# Altium PCB 4layer_main_board.PcbDoc
Units mm, origin at the board's own origin, x right, y up, seen from the top; angles counter-clockwise.
Board outline 50 x 100 mm, 4 copper layers (Top Layer, Int1 (GND), Int2 (PWR), Bottom Layer), stack 1.369 mm thick; 65 components, 49 nets, 289 pads, 72 vias.
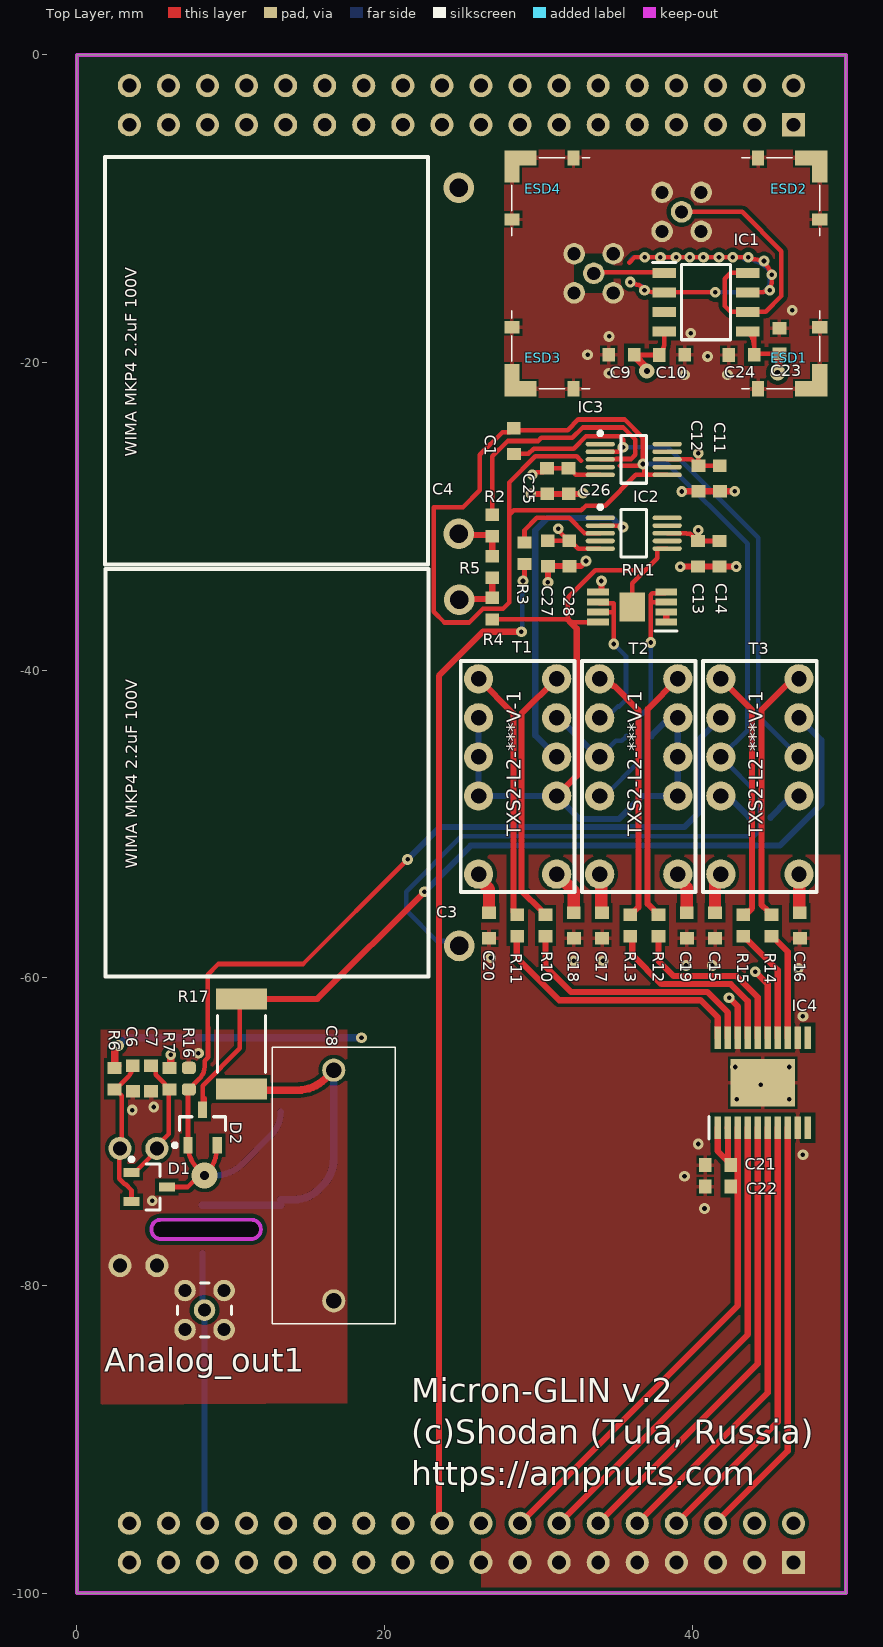
[diagram p0: Top Layer view]
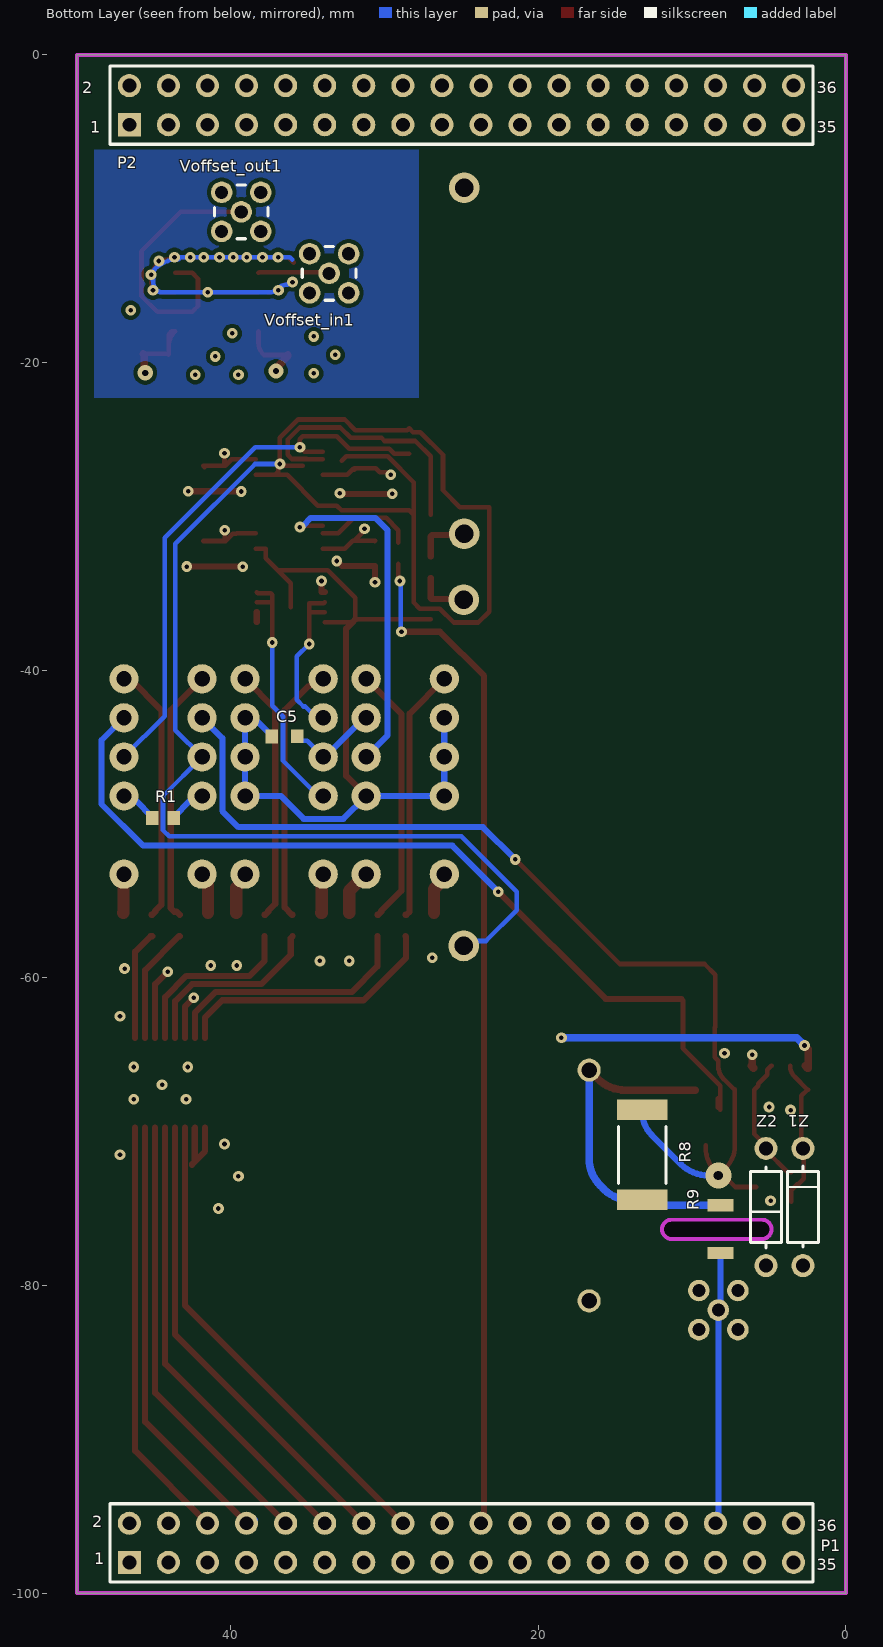
[diagram p1: Bottom Layer view, seen from below]
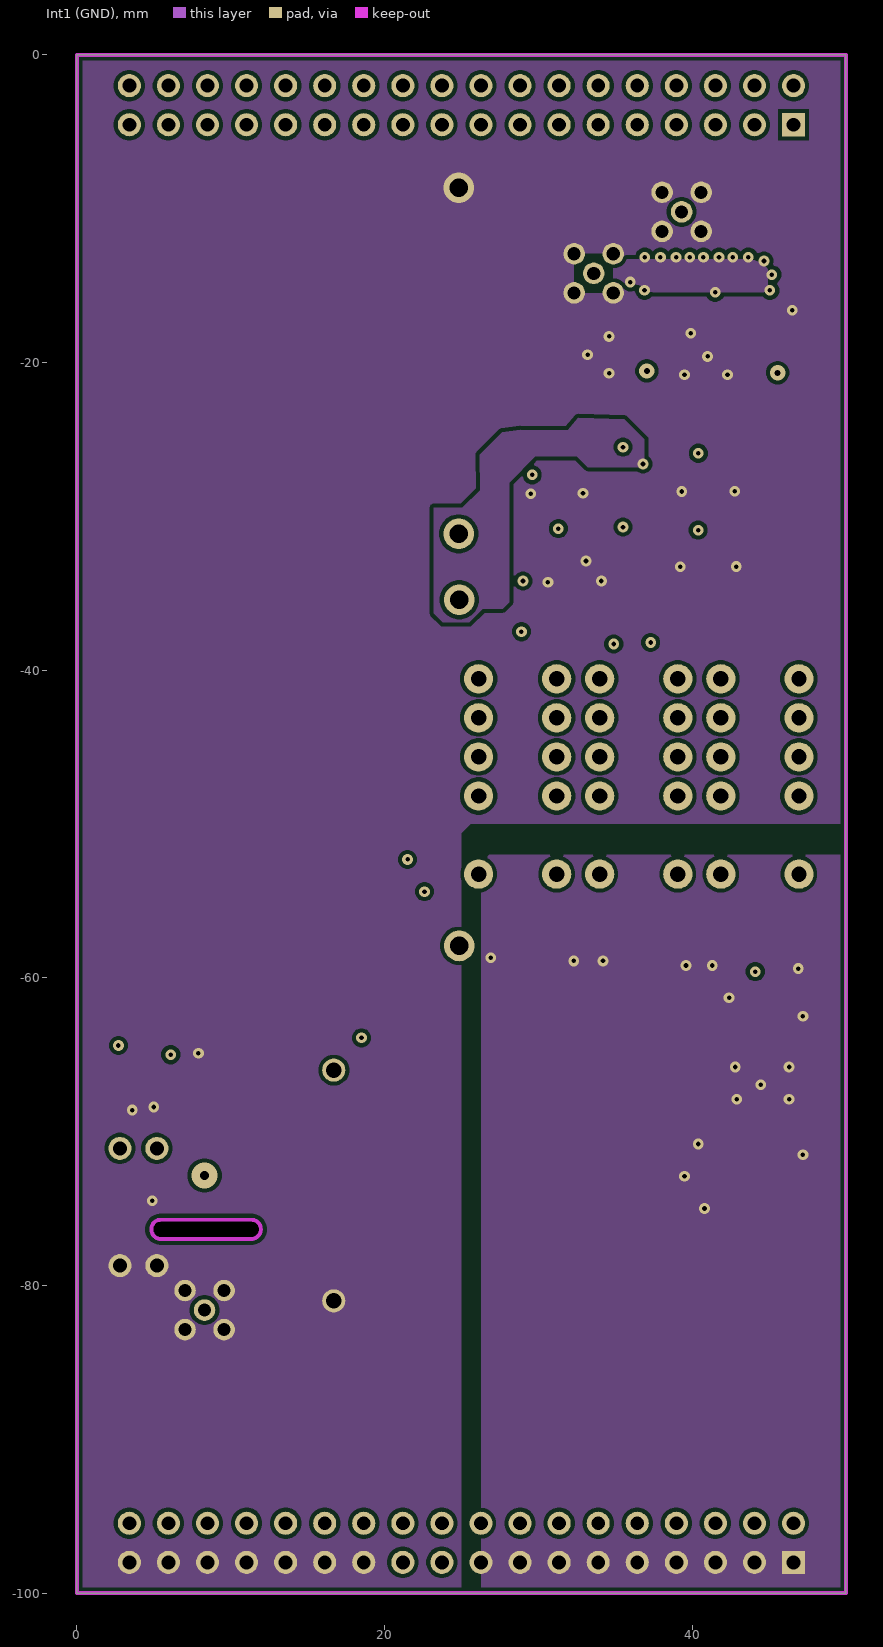
[diagram p2: Int1 (GND)]
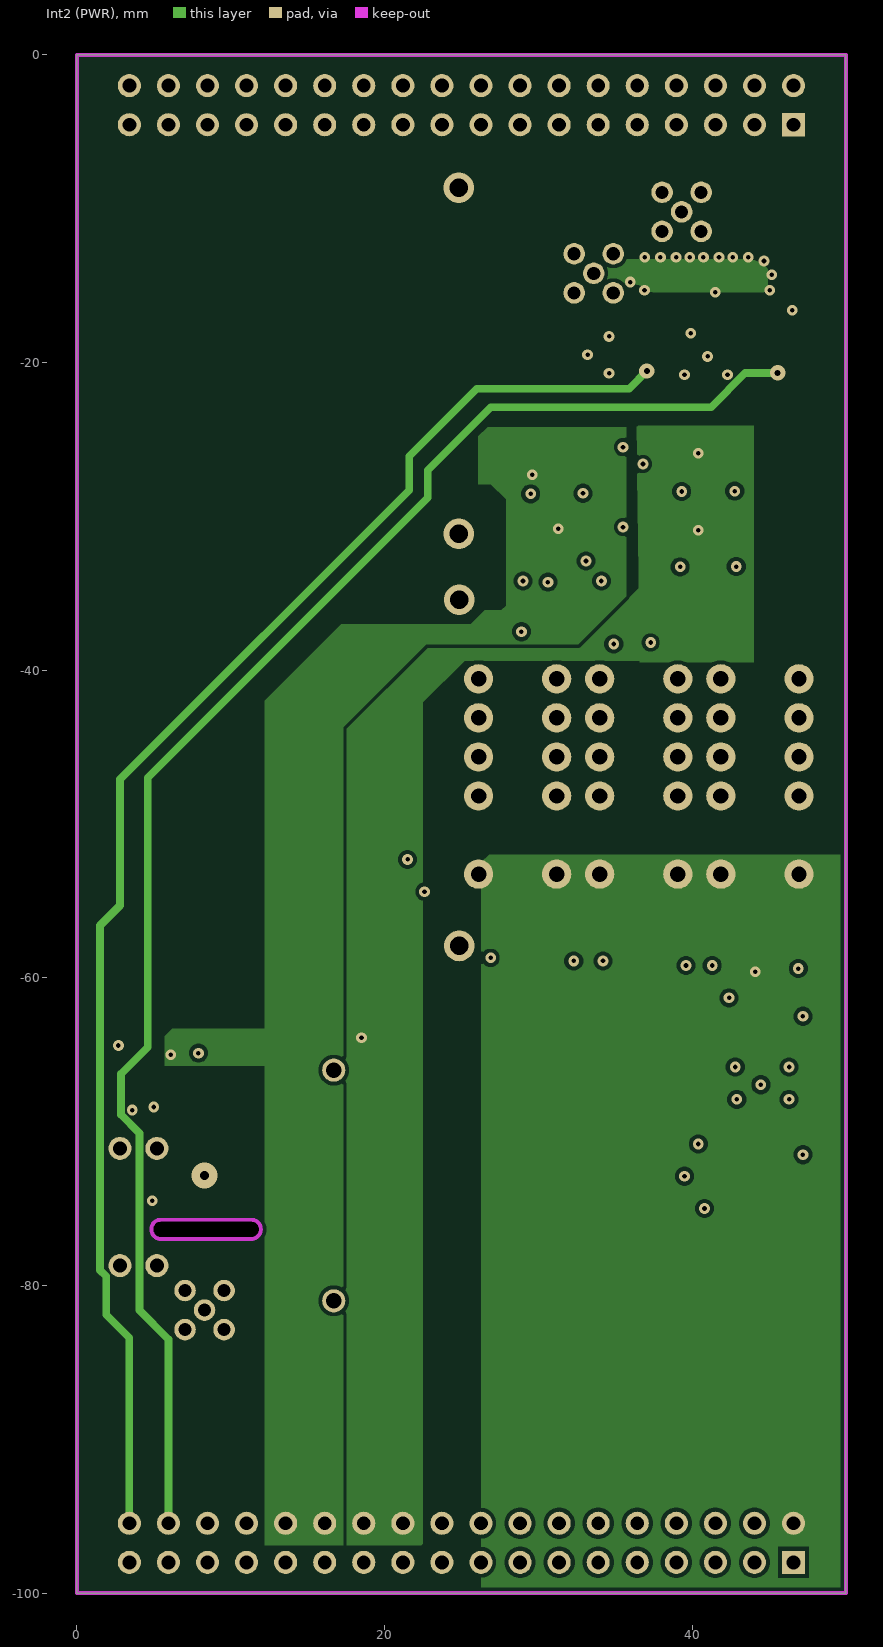
[diagram p3: Int2 (PWR)]

## Layer stack, top to bottom
Top Solder: solder mask 0.0254, SM-001, Dk 4
Top Layer: signal copper 0.035
Dielectric 1: prepreg 0.1295, PP-017, Dk 4.3
Dielectric 2: prepreg 0.1295, PP-017, Dk 4.3
Int1 (GND): signal copper 0.035
Dielectric 3: core 0.7112, Core-039, Dk 4.8
Int2 (PWR): signal copper 0.035
Dielectric 4: prepreg 0.1295, PP-017, Dk 4.3
Dielectric 5: prepreg 0.1295, PP-017, Dk 4.3
Bottom Layer: signal copper 0.035
Bottom Solder: solder mask 0.0254, SM-001, Dk 4

## Board outline
0,-100 50,-100 50,0 0,0
cut-out: 5.588,-75.725 11.338,-75.725 cw(c11.338,-76.35) 11.963,-76.35 cw(c11.338,-76.35) 11.338,-76.975 5.463,-76.975 cw(c5.463,-76.35) 4.838,-76.35 cw(c5.463,-76.35) 5.463,-75.725

## Design rules (kind name [scope] priority, off if disabled: settings)
BoardOutlineClearance [All] p1: gap=0.381 ignorepadtopadclearanceinfootprint=FALSE
Clearance "Clearance Polygons" [InPolygon] p1: gap=0.254 ignorepadtopadclearanceinfootprint=FALSE except(0: Arc-Hole Track-Hole SMDPad-Hole THPad-Hole Via-Hole Fill-Hole Poly-Hole Region-Hole Text-Hole)
Clearance [All] p2: gap=0.127 ignorepadtopadclearanceinfootprint=FALSE except(0: Arc-Hole Track-Hole SMDPad-Hole THPad-Hole Via-Hole Fill-Hole Poly-Hole Region-Hole Text-Hole)
ComponentClearance "HM-TRP & UFL" [InComponent('X1') vs InComponent('U1')] p1: gap=0 collisioncheckmode=3 verticalgap=0 showdistances=FALSE
ComponentClearance [All] p2: gap=0.025 collisioncheckmode=3 verticalgap=0.025 showdistances=FALSE
DiffPairsRouting [All] p1: maxlimit=10 minlimit=0.127 mostfreqgap=0.203 toplayer_minwidth=0.127 toplayer_maxwidth=0.381 toplayer_prefwidth=0.203 midlayer1_minwidth=0.127 midlayer1_maxwidth=0.381 midlayer1_prefwidth=0.203 midlayer2_minwidth=0.127 midlayer2_maxwidth=0.381 midlayer2_prefwidth=0.203 bottomlayer_minwidth=0.127 bottomlayer_maxwidth=0.381 bottomlayer_prefwidth=0.203 maxuncoupledlength=12.7
HoleSize [All] p1: absolutevalues=TRUE maxlimit=6.731 minlimit=0.254 maxpercent=80.000 minpercent=20.000
HoleToHoleClearance [All] p1: gap=0.254 allowstackedmicrovias=FALSE
MinimumAnnularRing [All] p1: minimumring=0.102
MinimumSolderMaskSliver [All] p1: minsoldermaskwidth=0
PlaneClearance [All] p1: clearance=0.254
PlaneConnect [All] p1: planeconnectstyle=Direct reliefexpansion=0.102 reliefentries=4 reliefconductorwidth=0.152 reliefairgap=0.152
PolygonConnect PolygonConnect_pwr_gnd [IsPoly] p1: thpad.connectstyle=Direct thpad.reliefconductorwidth=0.254 thpad.reliefentries=4 thpad.polygonreliefangle="90 Angle" thpad.airgapwidth=0.152 smdpad.connectstyle=Relief smdpad.reliefconductorwidth=0.254 smdpad.reliefentries=4 smdpad.polygonreliefangle="90 Angle" smdpad.airgapwidth=0.152 via.connectstyle=Direct via.reliefconductorwidth=0.254 via.reliefentries=4 via.polygonreliefangle="90 Angle" via.airgapwidth=0.152
PolygonConnect PolygonConnect_1 [All] p2: connectstyle=Relief reliefconductorwidth=0.254 reliefentries=4 polygonreliefangle="90 Angle" airgapwidth=0.254
PolygonConnect "Via connect style" [isVia] p3: connectstyle=Direct reliefconductorwidth=0.254 reliefentries=4 polygonreliefangle="90 Angle" airgapwidth=0.254
RoutingCorners [All] p1: cornerstyle=45-Degree minsetback=1.25 maxsetback=1.25
RoutingVias [All] p1: holewidth=0.305 width=0.559 viastyle="Through Hole" minholewidth=0.254 minwidth=0.457 maxholewidth=2.54 maxwidth=2.896
SilkToSilkClearance [All] p1: silktosilkclearance=0
SilkToSolderMaskClearance [IsPad] p1: minsilkscreentomaskgap=0.127 clearancetoexposedcopper=TRUE
SolderMaskExpansion Guard_1 [Grd] p1: expansion=0.05 istentingtop=FALSE
SolderMaskExpansion [All] p2: expansion=0.064 istentingtop=FALSE
Width GND [InNet('GND')] p1: maxlimit=0.762 minlimit=0.254 preferedwidth=0.508
Width Power [InNetClass('Power')] p2: maxlimit=1.016 minlimit=0.508 preferedwidth=0.762
Width 3V3 [InNetClass('3V3')] p3: maxlimit=0.762 minlimit=0.254 preferedwidth=0.508
Width [All] p4: maxlimit=10.16 minlimit=0.152 preferedwidth=0.203
20 further rules are at their usual default settings.

## Components (designator, comment, footprint, x,y, rotation, side; value= is the part's Value field where it differs from the comment)
Analog_out1 "MMCX" MMCX2.54-V5 8.3,-81.6 r0 top
C1 "1uF 50V 0603" "CAP 0603" 28.4,-25.1 r90 top
C3 "WIMA MKP4 2.2uF 100V" "90g WIMA MKP4 2.2uF 100V" 22.857,-59.924 r90 top locked
C4 "WIMA MKP4 2.2uF 100V" "90g WIMA MKP4 2.2uF 100V" 22.825,-33.138 r90 top locked
C5 "1nF 100V 0603" "CAP 0603" 36.5,-44.3 r180 bottom
C6 "1uF 50V 0603" "CAP 0603" 3.64,-66.556 r270 top
C7 "1uF 50V 0603" "CAP 0603" 4.826,-66.556 r270 top
C8 "WIMA MKP4 680nF 100V" MKP4F036804F00KSSD 16.7,-81 r90 top
C9 "100nF 100V 0603" "CAP 0603" 35.397,-19.499 r180 top
C10 "1uF 50V 0603" "CAP 0603" 38.699,-19.499 r0 top
C11 "100nF 100V 0603" "CAP 0603" 41.807,-27.545 r270 top
C12 "1uF 50V 0603" "CAP 0603" 40.41,-27.545 r270 top
C13 "100nF 100V 0603" "CAP 0603" 40.388,-32.445 r270 top
C14 "1uF 50V 0603" "CAP 0603" 41.785,-32.445 r270 top
C15 "1uF 0603" "CAP 0603" 41.491,-56.61 r270 top
C16 "1uF 0603" "CAP 0603" 47,-56.61 r270 top
C17 "1uF 0603" "CAP 0603" 34.145,-56.61 r270 top
C18 "1uF 0603" "CAP 0603" 32.309,-56.61 r270 top
C19 "1uF 0603" "CAP 0603" 39.655,-56.61 r270 top
C20 "1uF 0603" "CAP 0603" 26.8,-56.61 r270 top
C21 "1uF 0603" "CAP 0603" 41.668,-72.173 r180 top
C22 "100nF 0603" "CAP 0603" 41.668,-73.57 r180 top
C23 "100nF 100V 0603" "CAP 0603" 45.684,-18.61 r270 top
C24 "1uF 50V 0603" "CAP 0603" 43.213,-19.499 r0 top
C25 "100nF 100V 0603" "CAP 0603" 30.566,-27.696 r90 top
C26 "1uF 50V 0603" "CAP 0603" 31.963,-27.696 r90 top
C27 "100nF 100V 0603" "CAP 0603" 30.61,-32.396 r90 top
C28 "1uF 50V 0603" "CAP 0603" 32.012,-32.396 r90 top
D1 "BAV99" INF-SOT23_N 4.7,-73.6 r0 top
D2 "BAV99" INF-SOT23_N 8.17,-69.731 r90 top
ESD1 "Harwin Clips" "HARWIN - S0981-46R - CLIP" 48.785,-22.2 r90 top locked
ESD2 "Harwin Clips" "HARWIN - S0981-46R - CLIP" 48.785,-6.2 r180 top locked
ESD3 "Harwin Clips" "HARWIN - S0981-46R - CLIP" 27.785,-22.2 r0 top locked
ESD4 "Harwin Clips" "HARWIN - S0981-46R - CLIP" 27.785,-6.2 r270 top locked
IC1 "ADA4530-1ARZ" SOIC127P600X175-8N 40.903,-16.07 r0 top
IC2 "LTC2057HVHMS" LT-MS-10_M 36.2,-31.1 r0 top
IC3 "LTC2057HVHMS" LT-MS-10_M 36.2,-26.3 r0 top
IC4 "MAX4821EUP+" SOP65P638X110-21N 44.588,-66.825 r90 top
P1 "Header 18X2" HDR2X18 46.59,-98 r180 bottom locked
P2 "Header 18X2" HDR2X18 46.59,-4.54 r180 bottom locked
R1 "10K 0603" 1608[0603] 44.4,-49.6 r0 bottom
R2 "1K 0603" 1608[0603] 27,-30.6 r90 top
R3 "4.53K 0603" 1608[0603] 29.1,-32.4 r270 top
R4 "12K 0603 1%" 1608[0603] 27,-36 r270 top
R5 "11K 0603 1%" 1608[0603] 27,-33.3 r270 top
R6 "10k 0603" 1608[0603] 2.455,-66.566 r270 top
R7 "10k 0603" 1608[0603] 6.011,-66.566 r90 top
R8 "200R 2512" CRCW2512 13.25,-71.505 r90 bottom
R9 "1k 1206 ferrite beard" "Yageo HV 1206" 8.17,-76.335 r270 bottom
R10 "30R 0603" 1608[0603] 30.463,-56.6 r270 top
R11 "30R 0603" 1608[0603] 28.626,-56.6 r270 top
R12 "30R 0603" 1608[0603] 37.808,-56.6 r270 top
R13 "30R 0603" 1608[0603] 35.972,-56.6 r270 top
R14 "30R 0603" 1608[0603] 45.154,-56.6 r270 top
R15 "30R 0603" 1608[0603] 43.317,-56.6 r270 top
R16 "100K 0603" 1608[0603]_RES 7.281,-66.556 r90 top
R17 "1K 2512" CRCW2512 10.7,-64.3 r90 top
RN1 "LT5400ACMS8E-1#PBF" SOP65P490X110-9N 36.1,-35.9 r180 top
T1 "TXS2-L2-4.5V-1" TXS2-L2-4.5V-1 28.653,-46.909 r90 top locked
T2 "TXS2-L2-4.5V-1" TXS2-L2-4.5V-1 36.527,-46.909 r90 top locked
T3 "TXS2-L2-4.5V-1" TXS2-L2-4.5V-1 44.401,-46.909 r90 top locked
Voffset_in1 "MMCX" MMCX2.54-V5 33.6,-14.2 r90 bottom
Voffset_out1 "MMCX" MMCX2.54-V5 39.316,-10.204 r180 bottom
Z1 "BZX55C27" DO-35 2.8,-74.9 r90 bottom
Z2 "BZX55C27" DO-35 5.2,-74.9 r270 bottom

## Footprints (in the part's own frame and the unit in brackets; to place one, negate y for a bottom-side part, rotate by r counter-clockwise, add the part's x,y. Pads: shape width x height; smd on the part's side, far side on the other; paste and mask are expansions set on the pad)
"90g WIMA MKP4 2.2uF 100V" [mm]
  round 2 hole 1.2: 1(2,-2) 2(24.5,-2)
  silkscreen extent 0,0 26.5,21, body extent 0,0 26.5,21, height 11
1608[0603] [mm]
  rect 0.8x0.9 smd: 1(-0.7,0) 2(0.7,0)
  body extent -0.87,-0.48 0.87,0.48, height 1.3
1608[0603]_RES [mm] "Chip Capacitor, Body 1.6x0.8mm, IPC High Density"
  rrect50% 0.8x0.9 smd: 1(-0.7,0) 2(0.7,0)
  body extent -0.85,-0.45 0.85,0.45, height 0.45
"CAP 0603" [mm]
  rect 0.8x0.9 smd: 1(-0.84,-0.01) 2(0.82,0)
  body extent -0.85,-0.45 0.85,0.45, height 0.8
CRCW2512 [mm] "Chip Resistor, 2-Leads, Body 6,30x3,15mm, IPC Medium Density"
  rect 1.35x3.3 smd: 1(-2.925,0) 2(2.925,0)
  silkscreen extent -1.85,-1.55 1.85,1.55, body extent -3.25,-1.65 3.25,1.65, height 0.7
DO-35 [mm] "Diode, Axial, Body 4.6 x 2 mm (LxDia. max), Pin spacing 7.62mm"
  round 1.5 hole 0.9: 1(-3.81,0) 2(3.81,0)
  silkscreen extent -2.6,-1 2.65,1, body extent -4.08,-0.95 4.08,0.96, height 1.91
"HARWIN - S0981-46R - CLIP" [mm]
  rect 1x0.8 smd: 1(0.5,4.5)
  rect 1x2.1 smd: 1(0.5,1.05)
  rect 2.1x1 smd: 1(1.05,0.5)
  rect 0.8x1 smd: 1(4.5,0.5)
  silkscreen extent 0.5,0.5 5.56,5.56, body extent 0.05,0.07 4.81,4.83, height 1.35
HDR2X18 [mm] "Connector; Header; 18x2 Position"
  rect 1.5x1.5 hole 0.9: 1(0,0)
  round 1.5 hole 0.9: 2(0,2.54) 3(2.54,0) 4(2.54,2.54) 5(5.08,0) 6(5.08,2.54) 7(7.62,0) 8(7.62,2.54) 9(10.16,0) 10(10.16,2.54) 11(12.7,0) 12(12.7,2.54) 13(15.24,0) 14(15.24,2.54) 15(17.78,0) 16(17.78,2.54) 17(20.32,0) 18(20.32,2.54) 19(22.86,0) 20(22.86,2.54) 21(25.4,0) 22(25.4,2.54) 23(27.94,0) 24(27.94,2.54) 25(30.48,0) 26(30.48,2.54) 27(33.02,0) 28(33.02,2.54) 29(35.56,0) 30(35.56,2.54) 31(38.1,0) 32(38.1,2.54) 33(40.64,0) 34(40.64,2.54) 35(43.18,0) 36(43.18,2.54)
  silkscreen extent -1.27,-1.27 44.45,3.81
INF-SOT23_N [mm] "SOT23, 3-Leads, Body 2.9x1.3 mm, Pitch 0.95 mm, IPC Medium Density"
  rect 1.05x0.6 smd: 1(-1.15,0.95) 2(-1.15,-0.95) 3(1.15,0)
  silkscreen extent -1.27,-1.5 0.7,1.92, body extent -0.7,-1.5 0.7,1.5, height 1.1
LT-MS-10_M [mm] "SOP, 10-Leads, Body 3x3mm, Pitch 0.50mm, IPC Low Density"
  oval 1.9x0.3 smd: 1(-2.175,1) 2(-2.175,0.5) 3(-2.175,0) 4(-2.175,-0.5) 5(-2.175,-1) 6(2.175,-1) 7(2.175,-0.5) 8(2.175,0) 9(2.175,0.5) 10(2.175,1)
  silkscreen extent -2.3,-1.55 0.82,1.82, body extent -1.55,-1.55 1.55,1.55, height 1.1
MKP4F036804F00KSSD [mm]
  round 1.5 hole 1: 1(0,0) 2(15,0)
  silkscreen extent -1.5,-4 16.5,4, body extent -1.5,-4 16.5,4, height 15.1
MMCX2.54-V5 [mm]
  round 1.4 hole 0.85: 1(0,0) 2(-1.27,-1.27) 3(1.27,-1.27) 4(1.27,1.27) 5(-1.27,1.27)
  silkscreen extent -1.75,-1.75 1.75,1.75, body extent -1.78,-1.75 1.73,1.75, height 4.42
SOIC127P600X175-8N [mm]
  rect 1.525x0.65 smd: 1(-2.712,1.905) 2(-2.712,0.635) 3(-2.712,-0.635) 4(-2.712,-1.905) 5(2.712,-1.905) 6(2.712,-0.635) 7(2.712,0.635) 8(2.712,1.905)
  silkscreen extent -3.47,-2.45 1.6,2.58, body extent -3,-2.45 3,2.45, height 1.75
SOP65P490X110-9N [mm]
  rect 1.425x0.45 smd: 1(-2.212,0.975) 2(-2.212,0.325) 3(-2.212,-0.325) 4(-2.212,-0.975) 5(2.212,-0.975) 6(2.212,-0.325) 7(2.212,0.325) 8(2.212,0.975)
  rect 1.68x1.88 smd: 9(0,0)
  silkscreen extent -2.93,1.55 -1.5,1.55, body extent -2.45,-1.5 2.45,1.5, height 1.1
SOP65P638X110-21N [mm]
  rect 1.45x0.45 smd: 1(-2.925,2.925) 2(-2.925,2.275) 3(-2.925,1.625) 4(-2.925,0.975) 5(-2.925,0.325) 6(-2.925,-0.325) 7(-2.925,-0.975) 8(-2.925,-1.625) 9(-2.925,-2.275) 10(-2.925,-2.925) 11(2.925,-2.925) 12(2.925,-2.275) 13(2.925,-1.625) 14(2.925,-0.975) 15(2.925,-0.325) 16(2.925,0.325) 17(2.925,0.975) 18(2.925,1.625) 19(2.925,2.275) 20(2.925,2.925)
  rect 3.1x4.2 smd: 21(0,0)
  silkscreen extent -3.65,3.5 -2.2,3.5, body extent -3.19,-3.25 3.19,3.25, height 1.1
TXS2-L2-4.5V-1 [mm]
  round 1.9 hole 1: 1(-6.35,2.54) 3(-1.27,2.54) 4(1.27,2.54) 5(3.81,2.54) 6(6.35,2.54) 7(6.35,-2.54) 8(3.81,-2.54) 9(1.27,-2.54) 10(-1.27,-2.54) 12(-6.35,-2.54)
  silkscreen extent -7.5,-3.7 7.5,3.7, body extent -7.5,-3.7 7.6,3.7, height 8.2
"Yageo HV 1206" [mm]
  rect 0.8x1.7 smd: 1(-1.55,0) 2(1.55,0)
  body extent -1.6,-0.8 1.5,0.8, height 0.6

## Part data
Analog_out1 Voffset_in1 Voffset_out1: library part COAX-M, "RF Coaxial PCB Connector, MMCX; Thru-Hole, Vertical Mount Plug,  50 Ohm Impedance", PackageDocument="Rev. A, 16-Jun-1997", ComponentLink1Description="Manufacturer Link", ComponentLink1URL=http://www.amphenolrf.com/, DatasheetDocument=30-May-2003, DrillSize="Corresponds to nominal value.", LatestRevisionDate=15-Jul-2004, LatestRevisionNote="Component Replaced.", PackageReference=908-21103, PCB_Layout="Complies with manufacturer's recommendation.", Published=15-Jul-2004, Publisher="Altium Limited"
C1 C3 C4 C5 C6 C7 C9 C10 C11 C12 C13 C14 C15 C16 C17 C18 C19 C20 C21 C22 C23 C24 C25 C26 C27 C28: library part CC1206_1UF_25V_10%_X7R, "Non-polarised capacitor", Case=1206, Manufacturer=GENERIC, Manufacturer1 ComponentHeight=1.75mm, Manufacturer1 Example=KEMET, Manufacturer1 Part Number=C1206C105K3RAC, Tolerance=±10%, Voltage=25V, Author="CERN DEM JLC", Component Type=Standard, CreateDate=03.12.2007, HelpURL=\\cern.ch\dfs\Applications\Altium\Datasheets\CC1206_X7R_KEMET.pdf, LatestRevisionDate=03.12.2007, Manufacturer Part Number=CC1206_1UF_25V_10%_X7R, Mounted=Yes, Part Description="SMD Multilayer Chip Ceramic Capacitor", Part Number=CC1206_1UF_25V_10%_X7R, Pin Count=2, Sense=No, SMD=Yes, Socket=No, Status=Preferred, TC=X7R
C8: library part MKP4F036804F00KSSD, "Capacitor", Manufacturer_Name=WIMA, Mouser Part Number=505-MKP4F036804F00KS, Arrow Part Number=MKP4F036804F00KSSD, Arrow Price/Stock=https://www.arrow.com/en/products/mkp4f036804f00kssd/wima, Datasheet Link=https://componentsearchengine.com/Datasheets/1/MKP4F036804F00KSSD.pdf, Height=15mm, Manufacturer_Part_Number=MKP4F036804F00KSSD, Mouser Price/Stock=https://www.mouser.co.uk/ProductDetail/WIMA/MKP4F036804F00KSSD?qs=7N384g6sXM%2Ff4ZVcxZrvpg%3D%3D
D1 D2: "Silicon Switching Diode, SOT23, Reel, Green", Manufacturer=Infineon, Supplier Part Number 1=8_hDx09NysxyY_EZJdaSbs5L1p9U5ut-2MaZMQWGOaA, ComponentLink1Description="Manufacturer URL", ComponentLink1URL=http://www.infineon.com/, ComponentLink2Description=Datasheet, ComponentLink2URL=http://www.infineon.com/dgdl/bav99series.pdf?folderId=db3a30431400ef6801141b5844e103ea&fileId=db3a30431400ef6801141c1b237d042f, ComponentLink3Description="Package Specification", ComponentLink3URL=http://www.infineon.com/dgdl/smbta14_mmbta14.pdf?folderId=db3a30431441fb5d011445c30f210183&fileId=db3a30431441fb5d011445ef0201018c, Green=TRUE, Mounting Technology="Surface Mount", PackageDescription="3-Pin Small Outline Transistor Package, 1.3 x 2.9 mm Body, 0.95 mm Pitch", PackageReference=SOT23, PackageVersion=Apr-08, Packing=Reel, PartNumber=BAV99, Supplier 1=Arrow, Supplier 2=Farnell, Supplier 3=Farnell, Supplier Part Number 2=1056504RL, Supplier Part Number 3=1056504
IC1: "Integrated Circuit", Manufacturer_Name="Analog Devices", Mouser Part Number=584-ADA4530-1ARZ, Arrow Part Number=ADA4530-1ARZ, Arrow Price/Stock=https://www.arrow.com/en/products/ada4530-1arz/analog-devices?region=nac, Datasheet Link=http://www.analog.com/media/en/technical-documentation/data-sheets/ADA4530-1.pdf, Height=1.75mm, Manufacturer_Part_Number=ADA4530-1ARZ, Mouser Price/Stock=https://www.mouser.co.uk/ProductDetail/Analog-Devices/ADA4530-1ARZ?qs=JeIcUl65ClBv6gT9eb3ViA%3D%3D
IC2 IC3: library part LTC2057xHMS, "High Voltage, Low Noise, Zero-Drift Operational  Amplifier", Device=LTC2057HVHMS
IC4: "Integrated Circuit", Manufacturer_Name="Maxim Integrated", Mouser Part Number=700-MAX4821EUP, Datasheet Link=https://datasheets.maximintegrated.com/en/ds/MAX4820-MAX4821.pdf, Height=1.1mm, Manufacturer_Part_Number=MAX4821EUP+, Mouser Price/Stock=https://www.mouser.co.uk/ProductDetail/Maxim-Integrated/MAX4821EUP%2b?qs=1THa7WoU59EDqrTeBvjo%2FQ%3D%3D
P1 P2: "Header, 18-Pin, Dual row", LatestRevisionDate=17-Jul-2002, LatestRevisionNote="Re-released for DXP Platform.", Publisher="Altium Limited"
R1 R2 R3 R4 R5 R6 R7 R8 R9 R10 R11 R12 R13 R14 R15 R16 R17: library part "Resistor 0805", Avail=20, Order=ERA-3AEB49R9V
RN1: "Resistor Network", Manufacturer_Name="Analog Devices", Mouser Part Number=584-5400ACMS8E-1PBF, Arrow Part Number=LT5400ACMS8E-1#PBF, Arrow Price/Stock=https://www.arrow.com/en/products/lt5400acms8e-1pbf/analog-devices, Datasheet Link=https://www.analog.com/media/en/technical-documentation/data-sheets/5400fc.pdf, Height=1.1mm, Manufacturer_Part_Number=LT5400ACMS8E-1#PBF, Mouser Price/Stock=https://www.mouser.com/Search/Refine.aspx?Keyword=584-5400ACMS8E-1PBF
Z1 Z2: "Silicon Epitaxial Planar Zener Diode (0.3 to 0.5W)", Code_JEDEC=DO-204-AH, ComponentLink1Description="Manufacturer Link", ComponentLink1URL=http://www.vishay.com/, ComponentLink2Description=Datasheet, ComponentLink2URL=http://www.vishay.com/docs/85604/85604.pdf, DatasheetDocument=1-Apr-1999, LatestRevisionDate=17-Jul-2002, LatestRevisionNote="Re-released for DXP Platform.", PackageReference=DO-35, Published=8-Jun-2000, Publisher="Altium Limited"
ESD1 ESD2 ESD3 ESD4: Order=S0981-46R

## Via types
v1: diameter 0.7, hole 0.3, Top Layer to Bottom Layer, tented both sides, 69 vias
v2: diameter 1, hole 0.4, Top Layer to Bottom Layer, tented both sides, 2 vias
v3: diameter 1.7, hole 0.6, Top Layer to Bottom Layer, tented both sides, 1 vias

## Nets (pads, with @x,y where several pads share a name; then routed paths per layer and width w, separated by ;. In a path a pad name is that pad's centre, name@x,y a point inside that pad or via, vN(x,y) a via of type N, cw(c..) or ccw(c..) an arc to the next point about the centre after c; other vN are vias at no path point)
+3.3V: C21.1 C22.1 IC4.1 IC4.2 IC4.3 P1.16 | length 36.6
  Top Layer w0.4: P1.16 42.963,-81.307 IC4.3 ; IC4.1 41.663,-71.269 C21.1@42.338,-71.944 ; IC4.2 42.338,-69.775 C21.1@42.338,-71.944 ; C21.1 42.508,-72.113 C21.1@42.338,-71.944
  Bottom Layer w0.4: P1.16 P1.16@28.81,-95.368
+5V: C15.1 C16.1 C17.1 C18.1 C19.1 C20.1 IC4.15 P1.2 T1.1 T1.12 T2.1 T2.12 T3.1 T3.12 | length 21
  Top Layer w0.4: v1(44.1,-59.6) 44.913,-60.413 IC4.15
  Top Layer w0.8: T1.1 26.113,-53.557 26.79,-54.234 C20.1 ; T1.12 32.299,-54.365 C18.1 ; T2.1 34.085,-53.357 34.085,-55.77 C17.1 ; T2.12 39.067,-53.557 39.645,-54.134 C19.1 ; C15.1 41.481,-53.937 41.861,-53.557 T3.1 ; T3.12 46.965,-53.283 46.965,-55.77 C16.1
+8V: C23.2 C24.2 IC1.5 P1.34 | length 109.3
  Top Layer w0.3: C23.2 44.102,-19.43 C24.2 44.033,-18.984 ; 44.033,-18.984 ccw(c42.605,-18.984) IC1.5 43.858,-17.975 44.033,-18.15 44.033,-18.984
  Top Layer w0.5: v2(45.555,-20.675) 45.619,-20.61 45.619,-19.494 C23.2
  Int2 (PWR) w0.5: P1.34 5.95,-83.497 4.073,-81.62 4.073,-70.101 2.873,-68.901 2.873,-66.227 4.6,-64.5 4.6,-47 22.8,-28.8 22.8,-27 26.9,-22.9 41.228,-22.9 43.453,-20.675 v2(45.555,-20.675)
+30V: C11.1 C12.1 C13.1 C14.1 IC2.8 IC3.8 P1.22 P1.24 R6.1 | length 26.7
  Top Layer w0.3: IC2.8 39.6,-31.1 39.643,-31.143 39.866,-31.143 40.328,-31.605 C13.1 ; IC3.8 39.945,-26.3 40.35,-26.705 C12.1 ; v1@40.4,-30.9 v1(40.389,-30.9) 40.378,-30.9 C13.1 ; v1(40.4,-25.9) C12.1 ; C11.1@41.702,-26.8 C11.1 C12.1 ; C14.1 41.77,-31.6 40.383,-31.6 C13.1
  Top Layer w0.5: R6.1@2.655,-65.716 2.505,-65.866 R6.1 2.455,-64.645 v1(2.7,-64.4)
  Bottom Layer w0.5: v1(2.7,-64.4) 3.2,-63.9 v1(18.5,-63.9)
-8V: C9.1 C10.1 IC1.4 P1.36 | length 100.8
  Top Layer w0.3: C9.1@36.285,-19.509 C10.1 ccw(c37.057,-18.707) 38.191,-18.707 IC1.4
  Top Layer w0.5: C9.1@36.285,-19.509 36.285,-19.587 36.959,-20.261 36.959,-20.454 v2(37.055,-20.55)
  Int2 (PWR) w0.5: P1.36 3.41,-83.41 1.9,-81.9 1.9,-79.404 1.5,-79.004 1.5,-56.6 2.8,-55.3 2.8,-47.1 21.6,-28.3 21.6,-26.1 26,-21.7 35.905,-21.7 v2(37.055,-20.55)
-30V: C25.2 C26.2 C27.2 C28.2 IC2.5 IC3.5 P1.26 P1.28 R7.2 | length 10.7
  Top Layer w0.3: v1(29.6,-27.3) 29.708,-27.3 29.882,-27.126 30.316,-27.126 C25.2 C26.2 ; C27.2@30.634,-31.6 C27.2 C28.2@31.962,-31.576 ; v1(31.3,-30.8) 31.377,-30.877 31.377,-30.991 C28.2@31.962,-31.576 ; C26.2@31.963,-26.976 31.929,-26.942 32.079,-26.942 32.437,-27.3 IC3.5 ; IC2.5 32.586,-32.1 32.062,-31.576 C28.2 C28.2@31.962,-31.576
  Top Layer w0.5: v1(6.1,-65) 6.1,-65.777 R7.2 6.019,-65.866 R7.2@6.169,-65.716
ada_grd: IC1.2 IC1.7 | length 41.9
  Top Layer w0.3: 35.9,-13.5 36.251,-13.149 v1(36.921,-13.149) v1(37.937,-13.149) v1(38.953,-13.149) v1(39.842,-13.149) v1(40.731,-13.149) v1(41.747,-13.149) v1(42.636,-13.149) v1(43.652,-13.149) ; 36.36,-14.927 cw(c36.36,-15.361) 36.667,-15.054 ccw(c37.586,-14.134) IC1.2@37.586,-15.435 ; 39.461,-15.435 IC1.2 41.701,-15.435 40.477,-15.435 ; IC1.7 44.459,-15.435 ccw(c44.459,-14.718) 45.176,-14.718 ; v1@43.906,-13.276 cw(c43.906,-14.546) v1@45.176,-14.546
  Bottom Layer w0.3: 36,-13.3 36.151,-13.149 v1(36.921,-13.149) v1(37.937,-13.149) v1(38.953,-13.149) v1(39.842,-13.149) v1(40.731,-13.149) v1(41.747,-13.149) v1(42.636,-13.149) v1(43.652,-13.149) ; 36.307,-14.927 cw(c36.307,-15.794) 36.921,-15.181 36.995,-15.255 ccw(c37.429,-14.822) 37.429,-15.435 v1(41.493,-15.435) ; 39.461,-15.435 v1(41.493,-15.435) ; 40.477,-15.435 v1(41.493,-15.435) ; v1@43.388,-13.276 cw(c43.388,-15.444) 44.922,-13.911 cw(c44.615,-14.218) 45.049,-14.218 45.049,-14.546 45.049,-14.695 cw(c44.181,-14.695) 44.795,-15.308 cw(c44.488,-15.001) 44.488,-15.435 v1(41.493,-15.435)
  other v1: 45.049,-15.308 36.9,-15.3 35.979,-14.769 45.176,-14.292 44.668,-13.403
AGND: Analog_out1.2 Analog_out1.3 Analog_out1.4 Analog_out1.5 C4.2 C6.2 C7.2 C8.1 C9.2 C10.2 C11.2 C12.2 C13.2 C14.2 C23.1 C24.1 C25.1 C26.1 C27.1 C28.1 ESD1.1 ESD2.1 ESD3.1 ESD4.1 P1.23 P1.25 P1.27 P1.29 P1.31 P1.33 P1.35 R16.2 RN1.5 Voffset_in1.2 Voffset_in1.3 Voffset_in1.4 Voffset_in1.5 Voffset_out1.2 Voffset_out1.3 Voffset_out1.4 Voffset_out1.5 Z1.1 Z2.2 | length 15.3
  Top Layer w0.4: v1@29.5,-28.5 v1(29.5,-28.536) C25.1 C26.1 32.864,-28.536 v1(32.9,-28.5) ; v1@30.6,-34.3 v1(30.62,-34.28) C27.1 C28.1 32.764,-33.236 v1(33.1,-32.9) ; RN1.5 34.075,-34.925 34.1,-34.9 v1(34.1,-34.2) ; v1@39.2,-33.3 39.235,-33.265 C13.2 C14.2 v1(42.865,-33.265) v1@42.9,-33.3 ; v1@39.3,-28.4 39.335,-28.365 C12.2 C11.2 v1(42.765,-28.365) v1@42.8,-28.4
  other v1: 4.9,-74.5 3.6,-68.6 5,-68.4 7.9,-64.9 39.218,-33.282 39.318,-28.382 39.5,-20.8 42.3,-20.8 34.6,-20.7 41,-19.6 33.2,-19.5 34.6,-18.3 39.9,-18.1 46.5,-16.6
DGND: C15.2 C16.2 C17.2 C18.2 C19.2 C20.2 C21.2 C22.2 IC4.9 IC4.12 IC4.18 IC4.21 P1.1 P1.3 P1.5 P1.7 P1.9 P1.11 P1.13 P1.15 P1.17 | length 2.8
  Top Layer w0.4: v1(42.4,-61.3) 42.963,-61.863 IC4.18
  other v1: 40.8,-75 39.5,-72.9 47.2,-71.5 40.4,-70.8 42.9,-67.9 46.3,-67.9 44.461,-66.952 42.8,-65.8 46.3,-65.8 47.2,-62.5 46.9,-59.4 39.6,-59.2 41.3,-59.2 32.3,-58.9 34.2,-58.9 26.9,-58.7
Grd: C1.2 C3.1 IC3.6 T3.4 | length 118.7
  Top Layer w0.3: 32.773,-26.373 32.5,-26.1 29.8,-26.1 28.1,-27.8 28.1,-28.176 28.1,-29.9 ; 35.307,-26.7 36.9,-26.7 36.9,-27.094 37.106,-27.3 ; v1(36.8,-26.6) 36.8,-24.9 35.6,-23.7 32.6,-23.7 31.9,-24.4 28.52,-24.4 C1.2 28.15,-24.53 27.67,-24.53 26.2,-26 26.2,-28.3 25.1,-29.4 23.2,-29.4 23.2,-36.2 23.9,-36.9 25.5,-36.9 26.4,-36 27.7,-36 28.1,-35.6 28.1,-29.9 ; IC3.6 37.356,-27.3 37.106,-27.3 ; 28.1,-29.9 28.4,-29.6 32.8,-29.6 33.1,-29.3 34.338,-29.3 36.337,-27.3 37.106,-27.3
  Bottom Layer w0.3: C3.1 24.54,-57.607 23.407,-57.607 21.4,-55.6 21.4,-54.4 25,-50.8 44,-50.8 44.4,-50.4 44.4,-48.178 T3.4 43.6,-43.9 43.6,-31.778 38.422,-26.6 v1(36.8,-26.6)
Hi_imp1: C3.2 R4.1 R5.2 | length 3.5
  Top Layer w0.4: C3.2 24.919,-35.362 26.938,-35.362 R4.1 R5.2
  Bottom Layer w0.4: C3.2@24.826,-35.455 C3.2
Hi_imp2: C4.1 R2.1 R5.1 | length 3.7
  Top Layer w0.4: C4.1 24.906,-31.219 26.919,-31.219 R2.1 R5.1
  Bottom Layer w0.4: C4.1@24.682,-31.281 C4.1
Hi_imp3: IC3.3 R2.2 | length 17.6
  Top Layer w0.3: R2.2 27,-26.1 28,-25.1 30,-25.1 30.2,-24.9 32.2,-24.9 32.876,-24.224 35.52,-24.224 36.3,-25.004 36.3,-26 36.027,-26.273 35.075,-26.273 35.048,-26.3 IC3.3
In: P1.20 R3.2 | length 66.7
  Top Layer w0.3: v1@28.9,-34.3 v1(29,-34.2) 29.1,-34.1 R3.2
  Top Layer w0.4: P1.20 23.53,-95.26 23.53,-40.37 26.4,-37.5 v1(28.9,-37.5)
  Bottom Layer w0.3: v1(28.9,-37.5) 28.95,-37.45 28.95,-34.25 v1(29,-34.2)
  Bottom Layer w0.4: P1.20 P1.20@23.73,-95.162
MA1: IC4.13 R14.2 | length 7.1
  Top Layer w0.4: R14.2@45.104,-57.3 R14.2 45.204,-57.3 46.213,-58.31 IC4.13
MA2: IC4.14 R15.2 | length 7.6
  Top Layer w0.4: R15.2 43.367,-57.3 45.563,-59.496 IC4.14
MA3: IC4.16 R12.2 | length 11.7
  Top Layer w0.4: R12.2 37.8,-57.308 37.8,-58.9 38.777,-59.877 42.877,-59.877 44.263,-61.263 IC4.16
MA4: IC4.17 R13.2 | length 12.4
  Top Layer w0.4: R13.2 36.1,-57.428 36.1,-58.5 38.004,-60.404 42.504,-60.404 43.613,-61.513 IC4.17
MA5: IC4.19 R10.2 | length 16.7
  Top Layer w0.4: R10.2 30.463,-59.263 32.131,-60.931 41,-60.931 42.313,-62.244 IC4.19
MA6: IC4.20 R11.2 | length 17.4
  Top Layer w0.4: R11.2 28.6,-57.326 28.6,-58.7 31.358,-61.458 40.546,-61.458 41.663,-62.575 IC4.20
NetC1_1: C1.1 IC3.2 T3.9 | length 36.3
  Top Layer w0.3: C1.1 29.356,-25.94 29.696,-25.6 32.3,-25.6 33.1,-24.8 35.324,-24.8 35.5,-24.976 v1(35.5,-25.5) 35.2,-25.8 IC3.2
  Bottom Layer w0.3: v1(35.5,-25.5) 38.4,-25.5 44.3,-31.4 44.3,-42.998 T3.9
NetC5_2: C5.2 T1.8 T2.4 | length 6.2
  Bottom Layer w0.3: T2.4 35.026,-44.6 35.43,-44.6 35.68,-44.35 C5.2 C5.2@35.709,-44.271
  Bottom Layer w0.4: T1.8 31.32,-43.099 33.86,-45.639 T2.4
NetC6_1: C6.1 D1.2 R6.2 Z1.2 | length 10.3
  Top Layer w0.3: R6.2 R6.2@2.505,-67.266 ; Z1.2@2.902,-71.09 Z1.2@2.902,-70.792 ; 3.33,-66.441 R6.2@2.505,-67.266 ; 3.33,-66.441 ccw(c2.605,-65.716) C6.1 ; D1.2 3.55,-73.8 3.182,-73.432 3.116,-73.432 2.748,-73.065 2.748,-71.667 3,-71.415 3,-71.09 2.913,-71.003 2.913,-70.792 2.913,-67.674 R6.2@2.505,-67.266
NetC7_1: C7.1 D1.1 R7.1 Z2.1 | length 8.6
  Top Layer w0.3: D1.1 3.775,-72.65 5.2,-71.225 Z2.1 5.2,-70.915 5.961,-70.154 5.961,-67.266 5.711,-67.016 5.711,-66.891 5.116,-66.296 5.116,-65.966 4.866,-65.716 C7.1
NetC8_2: C8.2 R8.1 R9.1 R17.1 | length 23.1
  Top Layer w0.5: R17.1@9.8,-67.3 14.348,-67.3 ccw(c14.348,-64.76) 16.144,-66.556 C8.2
  Bottom Layer w0.5: R9.1 R8.1@13.25,-74.785 ; R8.1 14.095,-74.43 ccw(c14.095,-72.116) 15.731,-73.752 15.956,-73.527 ccw(c14.16,-71.731) 16.7,-71.731 C8.2
NetIC1_1: IC1.1 Voffset_in1.1 | length 5.1
  Top Layer w0.3: Voffset_in1.1@33.067,-14.121 38.147,-14.121 IC1.1
NetIC1_6: IC1.6 IC1.8 Voffset_out1.1 | length 18.1
  Top Layer w0.3: Voffset_out1.1 43.247,-10.204 45.803,-12.76 45.803,-15.677 44.775,-16.705 IC1.6 42.509,-16.705 42.128,-16.324 42.128,-14.546 42.509,-14.165 IC1.8
NetIC2_2: IC2.2 T1.9 | length 22.9
  Top Layer w0.3: IC2.2 35.292,-30.6 35.392,-30.7 v1(35.5,-30.7)
  Bottom Layer w0.4: T1.9 29.8,-44.246 29.8,-30.9 30.6,-30.1 34.8,-30.1 v1@35.3,-30.6
NetIC2_3: IC2.3 R3.1 | length 6.5
  Top Layer w0.3: R3.1 29.1,-30.9 29.9,-30.1 32,-30.1 33,-31.1 IC2.3
NetR1_1: R1.1 T3.3 | length 2.5
  Bottom Layer w0.4: T3.3 42.148,-48.466 42.616,-48.466 43.7,-49.55 R1.1
NetR1_2: R1.2 T3.10 | length 2.5
  Bottom Layer w0.4: R1.2 45.1,-49.55 46.184,-48.466 46.654,-48.466 T3.10
NetR10_1: R10.1 T1.7 | length 17
  Top Layer w0.4: R10.1 30.413,-55.9 30.213,-55.7 30.213,-55.65 28.903,-54.341 28.903,-42.849 T1.7
NetR11_1: R11.1 T1.6 | length 16.4
  Top Layer w0.4: T1.6 28.376,-42.822 28.376,-55.7 28.576,-55.9 R11.1
NetR12_1: R12.1 T2.7 | length 16.5
  Top Layer w0.4: R12.1 37.758,-55.9 37.558,-55.7 37.558,-55.65 37.1,-55.192 37.1,-42.526 T2.7
NetR13_1: R13.1 T2.6 | length 16.9
  Top Layer w0.4: T2.6 34.393,-40.559 34.853,-41.019 34.919,-41.019 36.5,-42.6 36.5,-55.422 36.022,-55.9 R13.1
NetR14_1: R14.1 T3.7 | length 16.9
  Top Layer w0.4: R14.1 45.104,-55.9 44.904,-55.7 44.904,-55.65 44.5,-55.246 44.5,-42.6 46.541,-40.559 T3.7
NetR15_1: R15.1 T3.6 | length 16.5
  Top Layer w0.4: T3.6 43.9,-42.598 43.9,-55.466 43.666,-55.7 43.517,-55.7 R15.1
NetRN1_1: RN1.1 RN1.2 | length 0.6
  Top Layer w0.4: RN1.1 RN1.2
OUT: Analog_out1.1 P1.32 R9.2 | length 17.7
  Bottom Layer w0.4: Analog_out1.1@8.17,-81.6 R9.2 ; Analog_out1.1 8.3,-95.27 P1.32
Out_un_prot_FORCE: D1.3 D2.1 D2.2 R8.2 R16.1 T3.5 | length 68.9
  Top Layer w0.3: D1.3 7.212,-73.6 7.962,-72.85 v3(8.3,-72.85) ; R16.1@7.22,-67.256 D2.1 ccw(c9.366,-70.881) v3@7.848,-72.398 ; R16.1 7.963,-66.574 ; v3@7.849,-72.399 v3(8.3,-72.85) ; 7.963,-66.574 ccw(c7.148,-65.76) 8.3,-65.76 8.3,-65.387 8.527,-65.16 8.527,-63.227 8.5,-63.2 8.5,-59.8 9.2,-59.1 14.7,-59.1 v1(21.5,-52.3) ; D2.2 9.12,-70.978 cw(c6.58,-70.978) 8.376,-72.774 v3(8.3,-72.85)
  Bottom Layer w0.4: v3(8.3,-72.85) 8.952,-72.85 ccw(c8.952,-70.31) 10.748,-72.106 12.616,-70.238 ; 12.617,-70.237 ccw(c11.084,-68.707) R8.2@13.25,-68.707 ; v1(21.5,-52.3) 23.6,-50.2 39.5,-50.2 40.537,-49.163 40.537,-44.423 T3.5
Out_un_prot_SENSE: D2.3 R17.2 T3.8 | length 58.1
  Top Layer w0.3: D2.3 8.17,-67.018 10.6,-64.588 10.6,-61.475 R17.2 ; D2.3@8.27,-68.481 8.32,-68.431 8.32,-67.829
  Top Layer w0.4: R17.2 15.625,-61.375 v1(22.6,-54.4)
  Bottom Layer w0.4: v1(22.6,-54.4) 25.6,-51.4 45.7,-51.4 48.4,-48.7 48.4,-44.558 T3.8
Relay_a0: IC4.6 P1.10 | length 29.2
  Top Layer w0.4: P1.10 44.913,-86.977 IC4.6
Relay_a1: IC4.7 P1.8 | length 29.3
  Top Layer w0.4: P1.8 45.563,-88.867 IC4.7
  Top Layer w0.5: P1.8 P1.8@38.97,-95.189
  Bottom Layer w0.5: P1.8@38.481,-95.269 38.779,-95.269 P1.8
Relay_a2: IC4.8 P1.6 | length 27.7
  Top Layer w0.4: P1.6 46.213,-90.757 IC4.8
Relay_cs: IC4.4 P1.14 | length 30.8
  Top Layer w0.4: P1.14 43.613,-83.197 IC4.4
Relay_lvl: IC4.5 P1.12 | length 30
  Top Layer w0.4: P1.12 44.263,-85.087 IC4.5
x1: C5.1 IC2.6 R4.2 RN1.8 RN1.9 T1.3 T1.4 T1.5 T1.10 T2.8 T2.9 T2.10 | length 57.9
  Top Layer w0.3: R4.2 31.9,-36.7 31.9,-35.3 33.7,-33.5 36.943,-33.5 ; 32.075,-36.875 RN1.8 ; RN1.9 36.1,-34.343 36.943,-33.5 ; IC2.6 37.725,-32.1 37.725,-32.718 36.943,-33.5
  Top Layer w0.4: T1.10 32.5,-46.872 32.5,-37.3 32.075,-36.875 31.9,-36.7
  Bottom Layer w0.4: T1.5 T1.4 T1.3 T1.10 31.193,-48.193 32.673,-49.673 35.247,-49.673 36.741,-48.179 T2.10 T2.9 T2.8 38.78,-43.386 38.214,-43.386 37.34,-44.26 C5.1
x2: RN1.6 RN1.7 T2.5 | length 10.9
  Top Layer w0.3: RN1.7 34.881,-36.225 34.9,-36.244 ; RN1.6 33.963,-35.65 34.887,-35.65 34.9,-35.663 34.9,-36.244 ; v1(34.9,-38.3) 34.9,-36.244
  Bottom Layer w0.3: T2.5 34.42,-43.099 35.16,-42.359 35.266,-42.359 35.7,-41.924 35.7,-39.1 v1(34.9,-38.3)
x4: RN1.3 RN1.4 T2.3 | length 16.7
  Top Layer w0.3: v1(37.3,-38.2) 37.3,-35.6 ; RN1.3 37.325,-35.575 37.3,-35.6 ; RN1.4 38.237,-35 37.401,-35 37.3,-35.101 37.3,-35.6
  Bottom Layer w0.3: T2.3 34.306,-48.179 36.6,-45.885 36.6,-43 37.3,-42.3 v1(37.3,-38.2)
pads on no net: IC1.3 IC2.1 IC2.4 IC2.7 IC2.9 IC2.10 IC3.1 IC3.4 IC3.7 IC3.9 IC3.10 IC4.10 IC4.11 P1.4 P1.18 P1.19 P1.21 P1.30 P2.1 P2.2 P2.3 P2.4 P2.5 P2.6 P2.7 P2.8 P2.9 P2.10 P2.11 P2.12 P2.13 P2.14 P2.15 P2.16 P2.17 P2.18 P2.19 P2.20 P2.21 P2.22 P2.23 P2.24 P2.25 P2.26 P2.27 P2.28 P2.29 P2.30 P2.31 P2.32 P2.33 P2.34 P2.35 P2.36

## Polygon pours and split planes (outlines as drawn)
DGND on Int1 (GND) "DGND_L02_P045" (solid, pour order 45): 50,-52 26.8,-52 26.3,-52.5 26.3,-100.1 26.4,-100 50,-100
AGND on Int1 (GND) "AGND_L02_P044" (solid, pour order 44): -0.2,-100.1 -0.1,-100 25,-100 25,-50.6 25.8,-49.8 49.9,-49.8 50,-49.7 50,0.1 0,0.1
AGND on Int1 (GND) "AGND_L02_P037" (solid, pour order 37): 22.8,-20.9 50,-20.9 50,-50 22.8,-50 22.8,-49.9
Grd on Int1 (GND) "GRD_L02_P036" (solid, pour order 36): 36.9,-25 35.6,-23.7 32.6,-23.6 31.911,-24.408 28.813,-24.37 27.65,-24.532 26.186,-25.991 26.213,-28.291 25.058,-29.431 23.2,-29.443 23.2,-36.3 23.8,-36.9 25.5,-36.9 26.4,-36 27.7,-36 28.1,-35.6 28.1,-27.8 29.8,-26.1 32.5,-26.1 33.2,-26.8 36.9,-26.8
ada_grd on Int1 (GND) "ADA_GRD_L02_P010" (solid, remove dead copper, pour order 10): 37.534,-15.435 cw(c37.534,-14.568) 36.921,-15.181 ccw(c36.307,-15.794) 36.307,-14.927 35.48,-14.927 ccw(c35.48,-16.661) 34.254,-15.435 34.015,-15.674 cw(c33.365,-15.023) 33.365,-15.943 33.247,-15.943 cw(c33.247,-13.775) 31.714,-15.308 31.565,-15.159 cw(c32.432,-14.292) 31.206,-14.292 cw(c33.658,-14.292) 31.924,-12.558 31.968,-12.514 cw(c32.581,-13.127) 32.581,-12.26 33.111,-12.26 cw(c33.111,-13.793) 34.195,-12.709 34.381,-12.895 ccw(c35.3,-11.975) 35.3,-13.276 43.568,-13.276 cw(c43.568,-15.01) 44.795,-13.784 cw(c44.488,-14.091) 44.922,-14.091 44.922,-15.054 cw(c44.615,-15.054) 44.832,-15.271 44.668,-15.435
AGND on Int1 (GND) "AGND_L02_P012" (solid, pour order 12): 27.777,-6.164 48.859,-6.164 48.859,-22.293 27.777,-22.293
AGND on Int1 (GND) "AGND_L02_P016" (solid, pour order 16): 17.568,-87.663 17.568,-63.381 1.566,-63.381 1.566,-87.765
+5V on Int2 (PWR) "+5V_L03_P046" (solid, pour order 46): 50,-52 26.8,-52 26.3,-52.5 26.3,-100.1 26.4,-100 50,-100
-30V on Int2 (PWR) "-30V_L03_P043" (solid, pour order 43): 12.6,-63.3 6.2,-63.3 5.7,-63.8 5.7,-65.7 12.6,-65.7
+30V on Int2 (PWR) "+30V_L03_P042" (solid, pour order 42): 36.7,-34.5 32.9,-38.3 22.7,-38.3 17.3,-43.7 17.3,-96.9 22.4,-96.9 22.5,-96.8 22.5,-42.1 25.2,-39.4 36.9,-39.4
-30V on Int2 (PWR) "-30V_L03_P041" (solid, pour order 41): 35.7,-35.1 27.9,-35.1 27.9,-35.8 27.6,-36.1 26.5,-36.1 25.6,-37 17.2,-37 12.2,-42 12.2,-96.9 17.3,-96.9 17.3,-43.7 22.7,-38.3 32.6,-38.3 35.7,-35.2
-30V on Int2 (PWR) "-30V_L03_P040" (solid, pour order 40): 35.7,-24.2 26.7,-24.2 26.1,-24.8 26.1,-27.9 26.9,-27.9 27.9,-28.9 27.9,-35.2 35.7,-35.2
+30V on Int2 (PWR) "+30V_L03_P039" (solid, pour order 39): 36.4,-24.1 44,-24.1 44,-39.5 36.6,-39.5
ada_grd on Int2 (PWR) "ADA_GRD_L03_P009" (solid, remove dead copper, pour order 9): 37.534,-15.435 cw(c37.534,-14.568) 36.921,-15.181 ccw(c36.307,-15.794) 36.307,-14.927 35.48,-14.927 ccw(c35.48,-16.661) 34.254,-15.435 34.015,-15.674 cw(c33.365,-15.023) 33.365,-15.943 33.247,-15.943 cw(c33.247,-13.775) 31.714,-15.308 31.565,-15.159 cw(c32.432,-14.292) 31.206,-14.292 cw(c33.658,-14.292) 31.924,-12.558 31.968,-12.514 cw(c32.581,-13.127) 32.581,-12.26 33.111,-12.26 cw(c33.111,-13.793) 34.195,-12.709 34.381,-12.895 ccw(c35.3,-11.975) 35.3,-13.276 43.568,-13.276 cw(c43.568,-15.01) 44.795,-13.784 cw(c44.488,-14.091) 44.922,-14.091 44.922,-15.054 cw(c44.615,-15.054) 44.832,-15.271 44.668,-15.435
DGND on Top Layer "DGND_L01_P047" (solid, pour order 47): 50,-52 26.8,-52 26.3,-52.5 26.3,-100.1 26.4,-100 50,-100
AGND on Top Layer "AGND_L01_P011" (solid, pour order 11): 27.777,-6.164 48.859,-6.164 48.859,-22.293 27.777,-22.293
AGND on Top Layer "AGND_L01_P017" (solid, pour order 17): 17.568,-87.663 17.568,-63.381 1.566,-63.381 1.566,-87.765
no net on Bottom Layer "NONET_L04_P013" (solid, pour order 13): 27.777,-6.164 48.859,-6.164 48.859,-22.293 27.777,-22.293
no net on Top Solder "NONET_L-01_P-001" (solid): 44.668,-13.403 44.465,-13.2 35.14,-13.2 34.87,-12.93 32.33,-12.93 32.33,-15.47 35.279,-15.47 35.979,-14.769 36.51,-15.3 45.041,-15.3 45.049,-15.308 45.176,-15.181 45.176,-14.292
no net on Top Solder "NONET_L-01_P-001" (solid): 41.239,-15.943 41.239,-14.927 43.017,-14.927 cw(c42.71,-15.234) 43.144,-15.234 43.144,-15.943
no net on Bottom Solder "NONET_L-01_P-001" (solid): 44.668,-13.403 44.465,-13.2 35.14,-13.2 34.87,-12.93 32.33,-12.93 32.33,-15.47 35.279,-15.47 35.979,-14.769 36.51,-15.3 45.041,-15.3 45.049,-15.308 45.176,-15.181 45.176,-14.292

## Keep-outs
Keep-Out Layer:
  lines w0.254: 0,-100 0,-78.994 0,-1.27 0,0 0.381,0 50,0 50,-100 0,-100 ; 4.838,-76.35 ccw(c5.463,-76.35) 5.463,-76.975 11.338,-76.975 ccw(c11.338,-76.35) 11.963,-76.35 ccw(c11.338,-76.35) 11.338,-75.725 8.213,-75.725 5.588,-75.725 5.463,-75.725 ccw(c5.463,-76.35) 4.838,-76.35

## Other copper
Top Layer:
  pour cut-out: 32.33,-12.93 34.87,-12.93 34.87,-15.47 32.33,-15.47
Int1 (GND):
  pour cut-out: 34.87,-12.93 32.33,-12.93 32.33,-15.47 34.87,-15.47
Bottom Layer:
  pour cut-out: 34.87,-12.93 32.33,-12.93 32.33,-15.47 34.87,-15.47

## Silkscreen, mask and mechanical layers (free items; w line width, h text height)
Top Overlay:
  text "Micron-GLIN v.2 / (c)Shodan (Tula, Russia) / https://ampnuts.com" at 21.735,-93.497 h2.7
Bottom Overlay:
  lines w0.15: 1.8,-73.6 3.8,-73.6 ; 4.2,-75.2 6.2,-75.2

## Dimensions
46.59,-98 to 50,-100 on Mechanical 1
3.41,-98 to 0,-100 on Mechanical 1
3.41,-98 to 0,-100 on Mechanical 1
3.41,-2 to 0.381,0 on Mechanical 1
3.41,-2 to 0,-1.27 on Mechanical 1
46.59,-2 to 50,0 on Mechanical 1

## Text inside footprints (layer, text, board x,y; h text height)
P1: Bottom Overlay "2" at 49.003,-95.714 h0.75; Bottom Overlay "1" at 48.876,-98.127 h0.75; Bottom Overlay "35" at 1.886,-98.508 h0.75; Bottom Overlay "36" at 1.886,-95.968 h0.75
P2: Bottom Overlay "36" at 1.886,-2.508 h0.75; Bottom Overlay "35" at 1.886,-5.048 h0.75; Bottom Overlay "1" at 49.13,-5.048 h0.75; Bottom Overlay "2" at 49.638,-2.508 h0.75
T1: Top Overlay "TXS2-L2-***V-1" at 29.137,-50.809 h1.52 r90
T2: Top Overlay "TXS2-L2-***V-1" at 37.011,-50.809 h1.52 r90
T3: Top Overlay "TXS2-L2-***V-1" at 44.885,-50.809 h1.52 r90